# Altium PCB FTDI_JTAG_Prog_SOM_Bd.PcbDoc
Units mm, origin at the board's own origin, x right, y up, seen from the top; angles counter-clockwise.
Board outline 80 x 22 mm, 4 copper layers (L1 (Sig), L2 (GND), L3 (PWR), L4 (Sig)), stack 0.77 mm thick; 53 components, 40 nets, 264 pads, 219 vias.
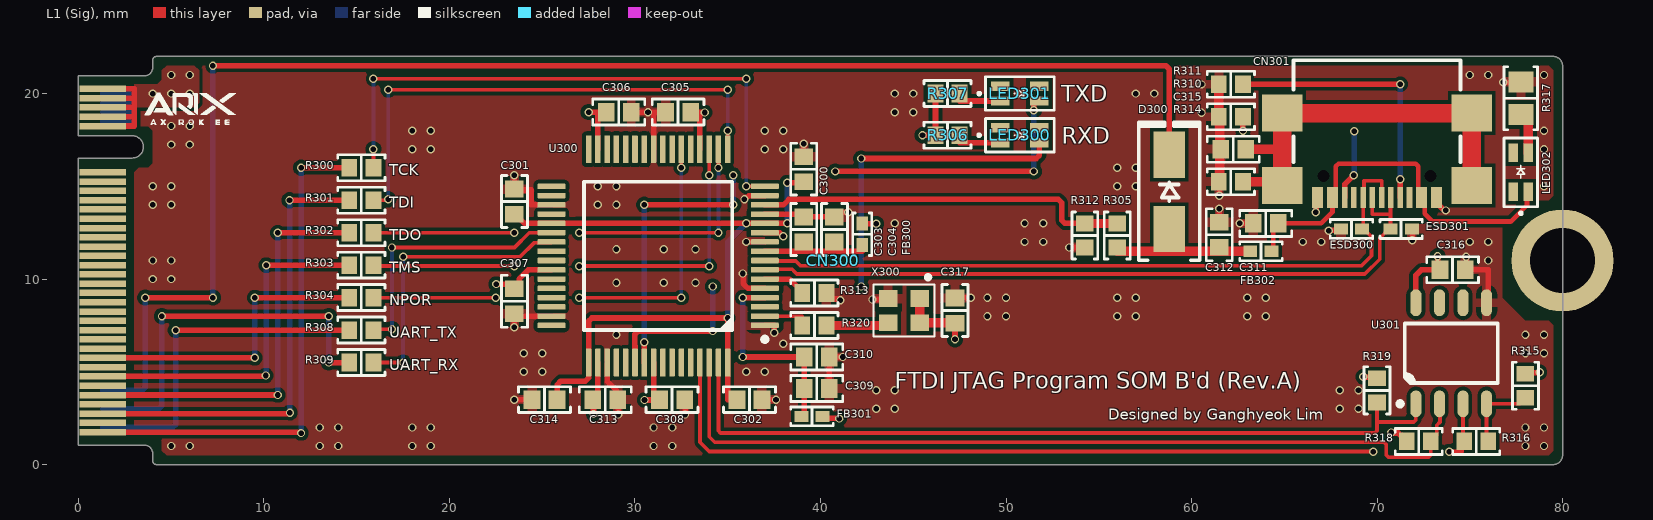
[diagram p0: L1 (Sig) view]
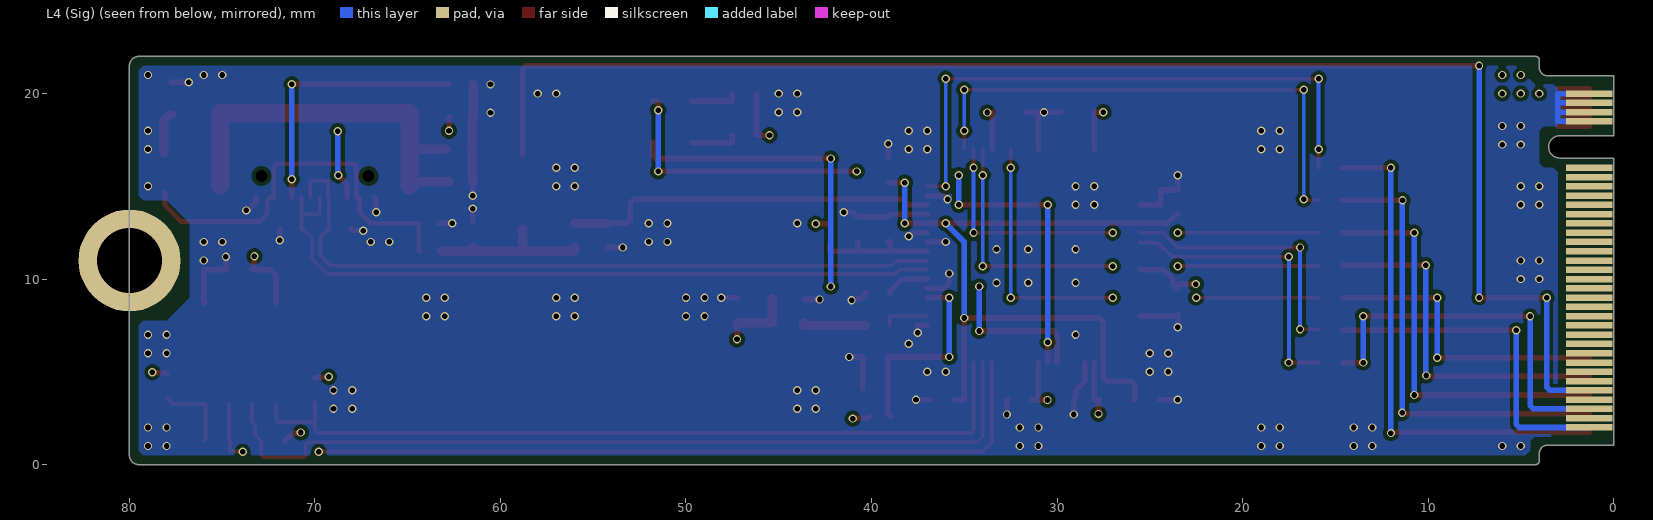
[diagram p1: L4 (Sig) view, seen from below]
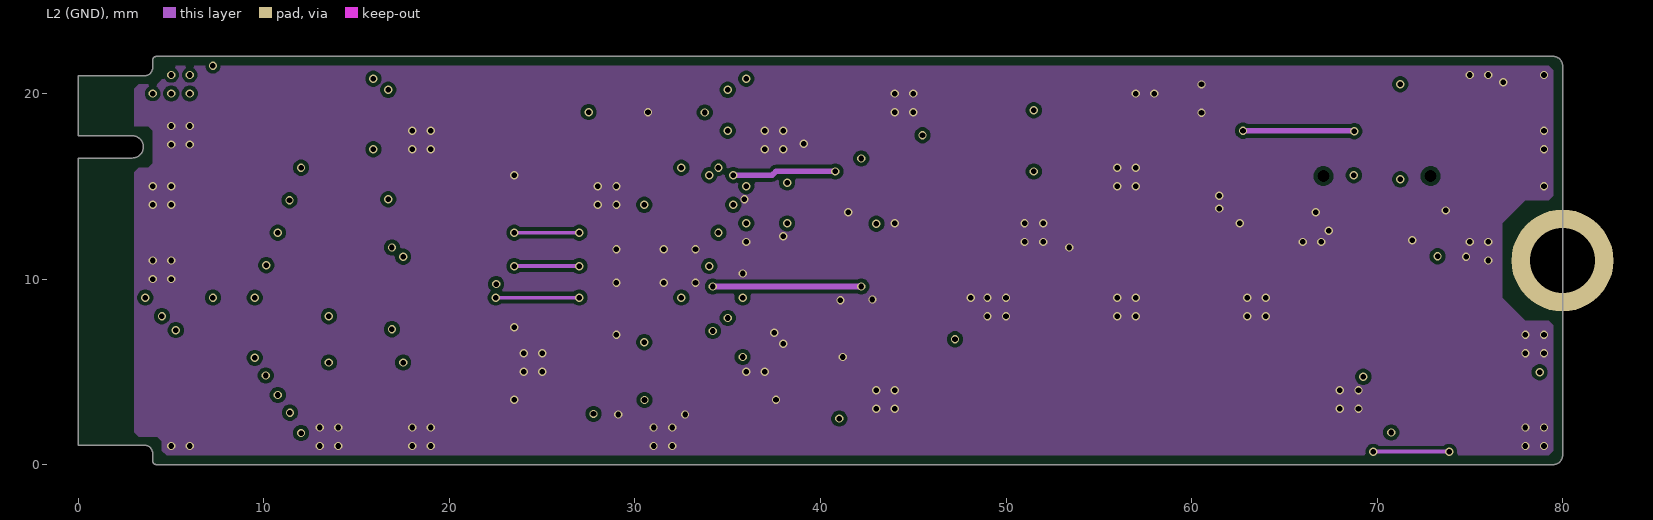
[diagram p2: L2 (GND)]
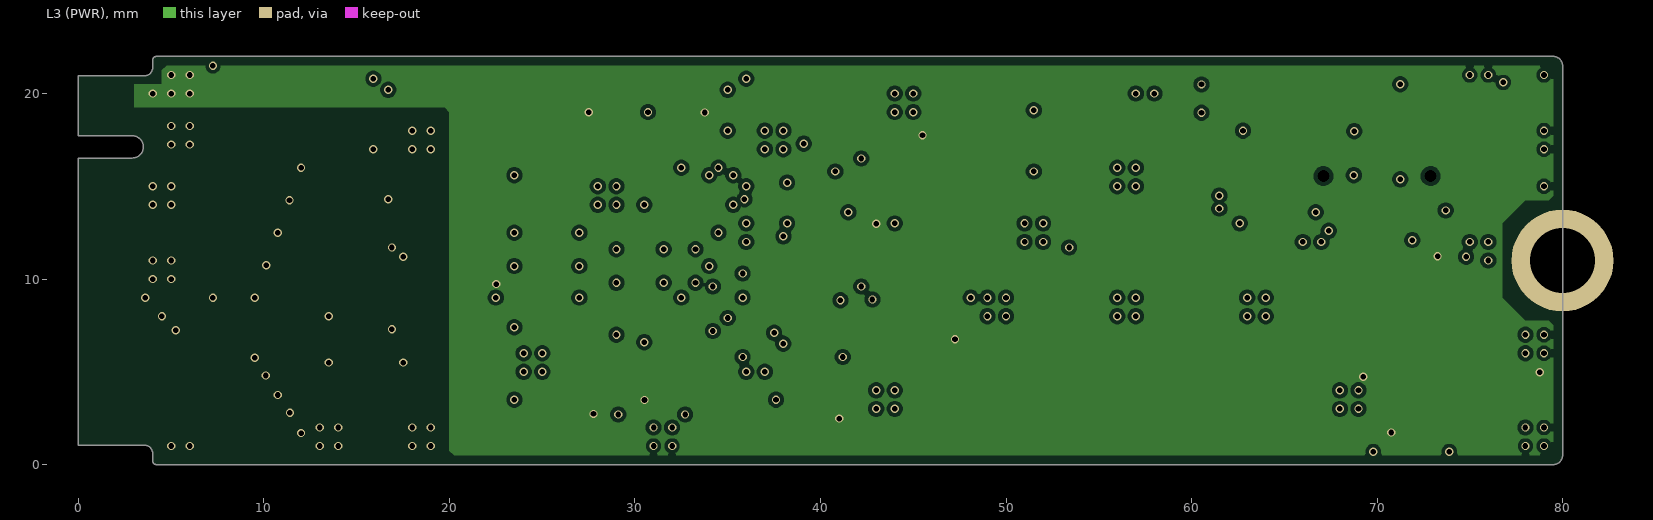
[diagram p3: L3 (PWR)]

## Layer stack, top to bottom
Top Mask: solder mask 0.015, Solder Resist, Dk 3.8
L1 (Sig): signal copper 0.035
Dielectric 1: prepreg 0.2, 7628, Dk 4.6
L2 (GND): signal copper 0.0175
Core: core 0.265, FR-4, Dk 4.5
L3 (PWR): signal copper 0.0175
Dielectric 2: prepreg 0.2, 7628, Dk 4.6
L4 (Sig): signal copper 0.035
Bottom Mask: solder mask 0.015, Solder Resist, Dk 3.8

## Board outline
0,16.525 2.9,16.525 ccw(c2.9,17.125) 2.9,17.725 0,17.725 0,20.95 3.55,20.95 ccw(c3.55,21.4) 4,21.4 4,21.8 cw(c4.2,21.8) 4.2,22 79.5,22 cw(c79.5,21.5) 80,21.5 80,0.5 cw(c79.5,0.5) 79.5,0 4.2,0 cw(c4.2,0.2) 4,0.2 4,0.6 ccw(c3.55,0.6) 3.55,1.05 0,1.05

## Design rules (kind name [scope] priority, off if disabled: settings)
BoardOutlineClearance [All] p1: gap=0.2 ignorepadtopadclearanceinfootprint=FALSE except(0.4: Arc-SplitBarrior Arc-SplitContinuation Track-SplitBarrior Track-SplitContinuation SMDPad-SplitBarrior SMDPad-SplitContinuation THPad-SplitBarrior THPad-SplitContinuation Via-SplitBarrior Via-SplitContinuation Fill-SplitBarrior Fill-SplitContinuation Poly-SplitBarrior Poly-SplitContinuation Region-SplitBarrior Region-SplitContinuation Text-SplitBarrior Text-SplitContinuation)
Clearance "Clearance Bottom Layer" [OnLayer('Bottom Layer')] p1: gap=0.203 ignorepadtopadclearanceinfootprint=TRUE except(0.254: Arc-Text Track-Text SMDPad-Text THPad-Text Via-Text Fill-Text Poly-Text Region-Text Text-Text)
Clearance "Clearance Top Layer" [OnLayer('Top Layer')] p2: gap=0.203 ignorepadtopadclearanceinfootprint=TRUE except(0.254: Arc-Text Track-Text SMDPad-Text THPad-Text Via-Text Fill-Text Poly-Text Region-Text Text-Text)
Clearance [All] p3: gap=0.2 ignorepadtopadclearanceinfootprint=FALSE except(0.089: Arc-Arc Arc-Track Arc-SMDPad Track-Track Track-SMDPad SMDPad-SMDPad; 0.127: Arc-Via Track-Via SMDPad-Via THPad-Via Via-Via; 0.254: Arc-Text Track-Text SMDPad-Text THPad-Text Via-Text Fill-Text Poly-Text Region-Text Text-Text)
ComponentClearance [All] p1: gap=0.254 collisioncheckmode=3 verticalgap=0.254 showdistances=FALSE donotcheckwithout3dbody=TRUE
DiffPairsRouting [All] p1: maxlimit=0.254 minlimit=0.2 mostfreqgap=0.25 toplayer_minwidth=0.1 toplayer_maxwidth=0.381 toplayer_prefwidth=0.2 midlayer1_minwidth=0.1 midlayer1_maxwidth=0.381 midlayer1_prefwidth=0.2 midlayer2_minwidth=0.1 midlayer2_maxwidth=0.381 midlayer2_prefwidth=0.2 bottomlayer_minwidth=0.1 bottomlayer_maxwidth=0.381 bottomlayer_prefwidth=0.2 maxuncoupledlength=12.7
HoleSize [All] p1: absolutevalues=TRUE maxlimit=6.3 minlimit=0.2 maxpercent=80.000 minpercent=20.000
MinimumAnnularRing [All] p1: minimumring=0.076
MinimumSolderMaskSliver [All] p1: minsoldermaskwidth=0.1
PolygonConnect PolygonConnect_1 [All] p1: thpad.connectstyle=Relief thpad.reliefconductorwidth=0.508 thpad.reliefentries=4 thpad.polygonreliefangle="90 Angle" thpad.airgapwidth=0.254 smdpad.connectstyle=Relief smdpad.reliefconductorwidth=0.508 smdpad.reliefentries=4 smdpad.polygonreliefangle="90 Angle" smdpad.airgapwidth=0.254 via.connectstyle=Direct via.reliefconductorwidth=0.508 via.reliefentries=4 via.polygonreliefangle="90 Angle" via.airgapwidth=0.254
RoutingCorners [All] p1: cornerstyle=Round minsetback=2.54 maxsetback=2.54
RoutingVias [All] p1: holewidth=0.3 width=0.45 viastyle="Through Hole" minholewidth=0.15 minwidth=0.3 maxholewidth=1 maxwidth=2
SilkToSilkClearance [All] p1: silktosilkclearance=0.1
SilkToSolderMaskClearance [IsPad] p1: minsilkscreentomaskgap=0.1 clearancetoexposedcopper=TRUE
SolderMaskExpansion [All] p1: expansion=0.102 istentingtop=FALSE
Width [All] p1: maxlimit=2 minlimit=0.1 preferedwidth=0.2
23 further rules are at their usual default settings.

## Classes and differential pairs
differential pair class DIFF90: USB_FTDI_D
differential pair USB_FTDI_D: +USB_FTDI_D_P -USB_FTDI_D_N

## Components (designator, comment, footprint, x,y, rotation, side; value= is the part's Value field where it differs from the comment)
C300 "100nF/16V/1608" "CAP 1608 (0603_INCH)" 39.1,15.925 r270 top
C301 "100nF/16V/1608" "CAP 1608 (0603_INCH)" 23.5,14.175 r270 top
C302 "100nF/16V/1608" "CAP 1608 (0603_INCH)" 36.175,3.5 r180 top
C303 "4.7uF/16V/1608" "CAP 1608 (0603_INCH)" 39.1,12.675 r270 top
C304 "100nF/16V/1608" "CAP 1608 (0603_INCH)" 40.75,12.675 r270 top
C305 "100nF/16V/1608" "CAP 1608 (0603_INCH)" 32.325,19 r0 top
C306 "100nF/16V/1608" "CAP 1608 (0603_INCH)" 29.125,19 r180 top
C307 "100nF/16V/1608" "CAP 1608 (0603_INCH)" 23.5,8.8 r90 top
C308 "100nF/16V/1608" "CAP 1608 (0603_INCH)" 32,3.5 r180 top
C309 "4.7uF/16V/1608" "CAP 1608 (0603_INCH)" 39.8,4.1 r180 top
C310 "100nF/16V/1608" "CAP 1608 (0603_INCH)" 39.8,5.8 r180 top
C311 "100nF/16V/1608" "CAP 1608 (0603_INCH)" 64,13 r0 top
C312 "100nF/16V/1608" "CAP 1608 (0603_INCH)" 61.5,12.392 r270 top
C313 "100nF/16V/1608" "CAP 1608 (0603_INCH)" 28.4,3.5 r180 top
C314 "4.7uF/16V/1608" "CAP 1608 (0603_INCH)" 25.125,3.5 r0 top
C315 "100nF/50V/1608" "CAP 1608 (0603_INCH)" 62.25,17 r180 top
C316 "100nF/16V/1608" "CAP 1608 (0603_INCH)" 74.075,10.5 r180 top
C317 "100nF/16V/1608" "CAP 1608 (0603_INCH)" 47.25,8.3 r270 top
CN300 "M.2-KEY-M_Edge" CON_M.2-KEY-M_MALE_22x80 0,11 r270 top locked
CN301 "MC-311S" "CON USB-Type-C (16P)" 70,17 r180 top locked
D300 "SS210" "DIO DO-214AC (SMA)" 58.8,14.7 r90 top
ESD300 "CG0402MLU-3.3G" "RES 1005 (0402_inch)" 68.625,12.7 r0 top
ESD301 "CG0402MLU-3.3G" "RES 1005 (0402_inch)" 71.3,12.7 r180 top
FB300 "BLM15PX121SN1D" "FB 1005 (0402_inch)" 42.25,12.418 r270 top
FB301 "BLM15PX121SN1D" "FB 1005 (0402_inch)" 39.543,2.6 r180 top
FB302 "BLM15PX121SN1D" "FB 1005 (0402_inch)" 63.743,11.5 r180 top
LED300 "BLUE/2012" "LED MHT170RGBCT (BLUE)" 50.75,17.75 r0 top
LED301 "BLUE/2012" "LED MHT170RGBCT (BLUE)" 50.75,20 r0 top
LED302 "BLUE/2012" "LED MHT170RGBCT (BLUE)" 77.75,15.75 r90 top
R300 "22R/1608" "RES 1608 (0603_inch)" 15.25,16 r180 top value=22R
R301 "22R/1608" "RES 1608 (0603_inch)" 15.25,14.25 r180 top value=22R
R302 "22R/1608" "RES 1608 (0603_inch)" 15.25,12.5 r180 top value=22R
R303 "22R/1608" "RES 1608 (0603_inch)" 15.25,10.75 r180 top value=22R
R304 "22R/1608" "RES 1608 (0603_inch)" 15.25,9 r180 top value=22R
R305 "100K/1608" "RES 1608 (0603_inch)" 56,12.35 r270 top value=100K
R306 "510R/1608" "RES 1608 (0603_inch)" 46.85,17.75 r180 top value=510R
R307 "510R/1608" "RES 1608 (0603_inch)" 46.85,20 r180 top value=510R
R308 "22R/1608" "RES 1608 (0603_inch)" 15.25,7.25 r180 top value=22R
R309 "22R/1608" "RES 1608 (0603_inch)" 15.25,5.5 r180 top value=22R
R310 "5.1K/1608" "RES 1608 (0603_inch)" 62.12,18.75 r0 top value=5.1K
R311 "5.1K/1608" "RES 1608 (0603_inch)" 62.12,20.5 r0 top value=5.1K
R312 "100K/1608" "RES 1608 (0603_inch)" 54.25,12.35 r90 top value=100K
R313 "12K/1608" "RES 1608 (0603_inch)" 39.67,9.25 r180 top value=12K
R314 "1M/1608/0.1W" "RES 1608 (0603_inch)" 62.12,15.25 r180 top value=1M
R315 "12K/1608" "RES 1608 (0603_inch)" 78,4.25 r90 top value=12K
R316 "2.2K/1608" "RES 1608 (0603_inch)" 75.35,1.25 r180 top value=2.2K
R317 "680R/2012" "RES 2012 (0805_inch)" 77.75,19.75 r90 top value=680R
R318 "12K/1608" "RES 1608 (0603_inch)" 72.25,1.25 r180 top value=12K
R319 "12K/1608" "RES 1608 (0603_inch)" 70,4 r90 top value=12K
R320 "22R/1608" "RES 1608 (0603_inch)" 39.67,7.5 r180 top value=22R
U300 "FT2232HL-REEL" IC_LQFP-64-0.5mm 31.25,11.25 r180 top locked
U301 "93LC56B-I/SN" "IC_SOIC-8 (4.90x3.90mm)" 74,6 r90 top
X300 "S2D12.000000B20F30T(12MHz)" "OSC SMD_2.5x2.0 (SCTF)" 44.5,8.3 r180 top

## Footprints (in the part's own frame and the unit in brackets; to place one, negate y for a bottom-side part, rotate by r counter-clockwise, add the part's x,y. Pads: shape width x height; smd on the part's side, far side on the other; paste and mask are expansions set on the pad)
"CAP 1608 (0603_INCH)" [mm] "Chip Capacitor, 2-Leads, Body 1.60x0.80mm, IPC Medium Density"
  rect 0.9x1 smd mask+0.04: 1(-0.675,0) 2(0.675,0)
  silkscreen extent -1.4,-0.7 1.4,0.7, body extent -0.8,-0.41 0.8,0.41, height 0.82
"CON USB-Type-C (16P)" [mm] "USB 2.0 5A 1 Surface Mount 16 Female -35℃~+75℃ Type-C SMD  USB Connectors ROHS"
  round 0 hole 0.65: 0(-2.89,1.45) 0(2.89,1.45)
  rect 0.6x1.15 smd mask+0.03: A1(-3.2,2.6) A4(-2.4,2.6) B1(3.2,2.6) B4(2.4,2.6)
  rect 0.3x1.15 smd mask+0.03: A5(-1.25,2.6) A6(-0.25,2.6) A7(0.25,2.6) A8(1.25,2.6) B5(1.75,2.6) B6(0.75,2.6) B7(-0.75,2.6) B8(-1.75,2.6)
  rect 2.18x2 smd mask+0.03: S1(-5.11,1.95) S2(-5.11,-1.95) S3(5.11,-1.95) S4(5.11,1.95)
  silkscreen extent -4.5,-4.8 4.5,0.7, body extent -5.65,-4.83 5.65,2.87, height 3.26
CON_M.2-KEY-M_MALE_22x80 [mm]
  rect 0.35x2.5 smd: 1(9.25,1.3) 3(8.75,1.3) 5(8.25,1.3) 7(7.75,1.3) 9(7.25,1.3) 11(6.75,1.3) 13(6.25,1.3) 15(5.75,1.3) 17(5.25,1.3) 19(4.75,1.3) 21(4.25,1.3) 23(3.75,1.3) 25(3.25,1.3) 27(2.75,1.3) 29(2.25,1.3) 31(1.75,1.3) 33(1.25,1.3) 35(0.75,1.3) 37(0.25,1.3) 39(-0.25,1.3) 41(-0.75,1.3) 43(-1.25,1.3) 45(-1.75,1.3) 47(-2.25,1.3) 49(-2.75,1.3) 51(-3.25,1.3) 53(-3.75,1.3) 55(-4.25,1.3) 57(-4.75,1.3) 67(-7.25,1.3) 69(-7.75,1.3) 71(-8.25,1.3) 73(-8.75,1.3) 75(-9.25,1.3)
  rect 0.35x2.5 smd far side: 2(9,1.3) 4(8.5,1.3) 6(8,1.3) 8(7.5,1.3) 10(7,1.3) 12(6.5,1.3) 14(6,1.3) 16(5.5,1.3) 18(5,1.3) 20(4.5,1.3) 22(4,1.3) 24(3.5,1.3) 26(3,1.3) 28(2.5,1.3) 30(2,1.3) 32(1.5,1.3) 34(1,1.3) 36(0.5,1.3) 38(0,1.3) 40(-0.5,1.3) 42(-1,1.3) 44(-1.5,1.3) 46(-2,1.3) 48(-2.5,1.3) 50(-3,1.3) 52(-3.5,1.3) 54(-4,1.3) 56(-4.5,1.3) 58(-5,1.3) 68(-7.5,1.3) 70(-8,1.3) 72(-8.5,1.3) 74(-9,1.3)
  round 5.5 hole 3.5: MH(0,80)
"DIO DO-214AC (SMA)" [mm] "Molded Diode, 2-Leads, Body 4.30x2.60mm, IPC Medium Density"
  rect 2.5x1.7 smd: 1(-2,0) 2(2,0)
  silkscreen extent -3.68,-1.65 3.75,1.65, body extent -2.6,-1.37 2.6,1.37, height 2.4
"FB 1005 (0402_inch)" [mm] "Chip Ferrite Bead, 2-Leads, Body 1.0x0.5mm, IPC Medium Density"
  rect 0.75x0.6 smd: 1(-0.575,0) 2(0.575,0)
  silkscreen extent -1.14,-0.51 1.14,0.51, body extent -0.5,-0.25 0.5,0.25, height 0.35
IC_LQFP-64-0.5mm [mm] "TSQFP, 64-Leads, Body 10.00x10.00mm, Pitch 0.50mm, IPC Medium Density"
  rrect25% 1.5x0.3 smd mask+0.038: 1(-5.75,3.75) 2(-5.75,3.25) 3(-5.75,2.75) 4(-5.75,2.25) 5(-5.75,1.75) 6(-5.75,1.25) 7(-5.75,0.75) 8(-5.75,0.25) 9(-5.75,-0.25) 10(-5.75,-0.75) 11(-5.75,-1.25) 12(-5.75,-1.75) 13(-5.75,-2.25) 14(-5.75,-2.75) 15(-5.75,-3.25) 16(-5.75,-3.75) 33(5.75,-3.75) 34(5.75,-3.25) 35(5.75,-2.75) 36(5.75,-2.25) 37(5.75,-1.75) 38(5.75,-1.25) 39(5.75,-0.75) 40(5.75,-0.25) 41(5.75,0.25) 42(5.75,0.75) 43(5.75,1.25) 44(5.75,1.75) 45(5.75,2.25) 46(5.75,2.75) 47(5.75,3.25) 48(5.75,3.75)
  rrect25% 0.3x1.5 smd mask+0.038: 17(-3.75,-5.75) 18(-3.25,-5.75) 19(-2.75,-5.75) 20(-2.25,-5.75) 21(-1.75,-5.75) 22(-1.25,-5.75) 23(-0.75,-5.75) 24(-0.25,-5.75) 25(0.25,-5.75) 26(0.75,-5.75) 27(1.25,-5.75) 28(1.75,-5.75) 29(2.25,-5.75) 30(2.75,-5.75) 31(3.25,-5.75) 32(3.75,-5.75) 49(3.75,5.75) 50(3.25,5.75) 51(2.75,5.75) 52(2.25,5.75) 53(1.75,5.75) 54(1.25,5.75) 55(0.75,5.75) 56(0.25,5.75) 57(-0.25,5.75) 58(-0.75,5.75) 59(-1.25,5.75) 60(-1.75,5.75) 61(-2.25,5.75) 62(-2.75,5.75) 63(-3.25,5.75) 64(-3.75,5.75)
  silkscreen extent -5.88,-4 4,4.62, body extent -6,-6 6,6, height 1.6
"IC_SOIC-8 (4.90x3.90mm)" [mm] "SOIC, 8-Leads, Body 4.90x3.90mm, Pitch 1.27mm, IPC Medium Density"
  oval 1.45x0.6 smd: 1(-2.725,1.905) 2(-2.725,0.635) 3(-2.725,-0.635) 4(-2.725,-1.905) 5(2.725,-1.905) 6(2.725,-0.635) 7(2.725,0.635) 8(2.725,1.905)
  silkscreen extent -2.85,-2.5 1.6,2.88, body extent -3.01,-2.45 3.01,2.45, height 1.5
"LED MHT170RGBCT (BLUE)" [mm] "Colorless transparence -30℃~+85℃ Positive post Common anode RGB 120° 0805  Light Emitting Diodes (LED) ROHS"
  rect 1x0.5 smd mask+0.04: 1(-1.05,0.4) 2(1.05,0.4) 3(1.05,-0.4) 4(-1.05,-0.4)
  silkscreen extent -2.25,-0.9 1.85,0.9, body extent -1,-0.62 1,0.62, height 0.9
"OSC SMD_2.5x2.0 (SCTF)" [mm] "SMD Oscillator_2.5x2.0 (SCTF)"
  rect 1x0.9 smd: 1(-0.85,-0.65) 2(0.85,-0.65) 3(0.85,0.65) 4(-0.85,0.65)
  silkscreen extent -1.65,-1.9 1.65,1.4, body extent -1.25,-1 1.25,1, height 0.9
"RES 1005 (0402_inch)" [mm] "Chip Resistor, 2-Leads, Body 1.0x0.5mm, IPC Medium Density"
  rect 0.75x0.6 smd: 1(-0.575,0) 2(0.575,0)
  silkscreen extent -1.14,-0.51 1.14,0.51, body extent -0.5,-0.25 0.5,0.25, height 0.35
"RES 1608 (0603_inch)" [mm] "Chip Resistor, 2-Leads, Body 1.60x0.80mm, IPC Medium Density"
  rect 0.85x0.95 smd: 1(-0.65,0) 2(0.65,0)
  silkscreen extent -1.27,-0.7 1.27,0.7, body extent -0.8,-0.4 0.8,0.4, height 0.45
"RES 2012 (0805_inch)" [mm] "Chip Resistor, 2-Leads, Body 2.00x1.25mm, IPC Medium Density"
  rect 1.15x1.35 smd: 1(-0.875,0) 2(0.875,0)
  silkscreen extent -1.7,-0.9 1.7,0.9, body extent -1,-0.62 1,0.63, height 0.6

## Part data
C300 C301 C302 C304 C305 C306 C307 C308 C310 C311 C312 C313 C316 C317: library part CAP_100nF/16V/1608, "Ceramic CAP_100nF/16V/1608", JLCPCB Part Type="Extended Part", LCSC Part #=C66501
C303 C309 C314: library part CAP_4.7uF/16V/1608, "Ceramic CAP_4.7uF/16V/1608", JLCPCB Part Type="Basic Part", LCSC Part #=C19666
C315: library part CAP_100nF/50V/1608, "Ceramic CAP_100nF/50V/1608", JLCPCB Part Type="Basic Part", LCSC Part #=C14663
CN300: library part CON_M.2-KEY-M_MALE, "M.2 Key M Edge"
CN301: library part CON_USB-Type-C, "USB 2.0 5A 1 Surface Mount 16 Female -35℃~+75℃ Type-C SMD  USB Connectors ROHS", JLCPCB Part Type="Extended Part", LCSC Part #=C2977718
D300: library part DIO_SS210, "100V 850mV@2A 2A SMA(DO-214AC)  Schottky Barrier Diodes (SBD) ROHS", JLCPCB Part Type="Basic Part", LCSC Part #=C14996
ESD300 ESD301: library part ESD_CG0402MLU-3.3G, "Varistor 1 Circuit Surface Mount, MLCV 0402 (1005 Metric)", JLCPCB Part Type="Extended Part", LCSC Part #=C2655393
FB300 FB301 FB302: library part FB_BLM15PX121SN1D, "55mΩ ±25% 120Ω@100MHz 0402  Ferrite Beads ROHS", JLCPCB Part Type="Extended Part", LCSC Part #=C88970
LED300 LED301 LED302: library part LED_MHT170RGBCT(BLUE), "Colorless transparence -30℃~+85℃ Positive post Common anode RGB 120° 0805  Light Emitting Diodes (LED) ROHS", JLCPCB Part Type="Extended Part", LCSC Part #=C2962094
R300 R301 R302 R303 R304 R308 R309 R320: library part RES_22R/1608/0.1W, "RES_22R/1608/0.1W", JLCPCB Part Type="Basic Part", LCSC Part #=C23345, Power Rating=0.1W, Precision=1%, Size=1608
R305 R312: library part RES_100K/1608/0.1W, "RES_100K/1608/0.1W", JLCPCB Part Type="Basic Part", LCSC Part #=C25803, Power Rating=0.1W, Precision=1%, Size=1608
R306 R307: library part RES_510R/1608/0.1W, "RES_510R/1608/0.1W", JLCPCB Part Type="Basic Part", LCSC Part #=C23193, Power Rating=0.1W, Precision=1%, Size=1608
R310 R311: library part RES_5.1K/1608/0.1W, "RES_5.1K/1608/0.1W", JLCPCB Part Type="Basic Part", LCSC Part #=C23186, Power Rating=0.1W, Precision=1%, Size=1608
R313 R315 R318 R319: library part RES_12K/1608/0.1W, "RES_12K/1608/0.1W", JLCPCB Part Type="Basic Part", LCSC Part #=C22790, Power Rating=0.1W, Precision=1%, Size=1608
R314: library part RES_1M/1608/0.1W, "RES_1M/1608/0.1W", JLCPCB Part Type="Basic Part", LCSC Part #=C22935, Power Rating=0.1W, Precision=1%, Size=1608
R316: library part RES_2.2K/1608/0.1W, "RES_2.2K/1608/0.1W", JLCPCB Part Type="Basic Part", LCSC Part #=C4190, Power Rating=0.1W, Precision=1%, Size=1608
R317: library part RES_680R/2012/0.125W, "RES_680R/2012/0.125W", JLCPCB Part Type="Basic Part", LCSC Part #=C17798, Power Rating=0.125W, Precision=1%, Size=2012
U300: library part IC_USB_FT2232HL-REEL, "USB Bridge, USB to UART,FIFO USB 2.0 UART Interface 64-LQFP (10x10)", JLCPCB Part Type="Extended Part", LCSC Part #=C27882
U301: library part IC_EEPROM_93LC56B-I/SN, "EEPROM Memory IC 2Kbit Microwire 2 MHz 8-SOIC", JLCPCB Part Type="Extended Part", LCSC Part #=C183620
X300: library part OSC_S2D12.000000B20F30T(12MHz), "3.3V~3.3V -40℃~+85℃ 20mA ±20ppm 12MHz SMD2520-4P  Oscillators ROHS", JLCPCB Part Type="Extended Part", LCSC Part #=C387449

## Via types
v1: diameter 0.45, hole 0.3, L1 (Sig) to L4 (Sig), tented both sides, 219 vias

## Nets (pads, with @x,y where several pads share a name; then routed paths per layer and width w, separated by ;. In a path a pad name is that pad's centre, name@x,y a point inside that pad or via, vN(x,y) a via of type N, cw(c..) or ccw(c..) an arc to the next point about the centre after c; other vN are vias at no path point)
+1.8V_FTDI: C300.2 C301.2 C302.2 C314.2 U300.12 U300.37 U300.49 U300.64 | length 41.7
  L1 (Sig) w0.3: C301.2 23.55,13.5 24.05,13 24.1,13 U300.37 26.79,13 26.792,13.002 34.708,13.002 34.71,13 v1(36,13) U300.12 v1(38.2,13) ; C314.2 25.8,4.3 26,4.5 27.324,4.5 27.5,4.676 27.5,7.724 27.676,7.9 v1(35,7.9) U300.64 35,3.5 C302.2 ; v1(38.2,15.2) 39.05,15.2 C300.2
  L4 (Sig) w0.3: v1(35,7.9) 35,12 v1(36,13) ; v1(38.2,13) v1(38.2,15.2)
+3.3V: C305.2 C306.2 C307.2 C308.2 C313.2 C316.2 C317.2 CN300.67 CN300.69 CN300.71 CN300.73 CN300.75 FB300.1 FB301.1 R306.2 R307.2 R315.2 R318.2 R319.2 U300.20 U300.31 U300.42 U300.50 U300.56 U301.8 X300.1 X300.4 | length 40.4
  L1 (Sig) w0.3: CN300.67 3,18.25 3,18.838 ; CN300.69 2.912,18.75 3,18.838 ; CN300.71 3,19.25 ; CN300.73 3,19.75 ; CN300.75 3,20.25 3,19.75 ; v1(22.513,9.73) 23.5,9.73 C307.2 23.75,9.725 23.75,10 24.25,10.5 U300.42 ; v1(27.5,19) 28,19 U300.31 ; v1(27.763,2.73) 27.763,3.462 C313.2 28,3.5 U300.50 ; v1(30.513,3.48) 31.305,3.48 C308.2 31,3.5 U300.56 ; U300.20 33.5,18.98 v1(33.763,18.98) ; FB301.1 40.209,2.509 40.984,2.509 v1(41.013,2.48) ; FB300.1 42.257,12.986 43.006,12.986 v1(43.013,12.98) ; v1(45.5,17.75) R306.2 R307.2 ; v1(47.25,6.75) C317.2 ; v1(69.263,4.73) 69.292,4.701 69.949,4.701 R319.2 ; v1(70.763,1.73) 70.792,1.701 71.149,1.701 71.275,1.575 71.325,1.575 71.6,1.3 R318.2 ; U301.8 72.095,10.207 72.388,10.5 C316.2 73.263,10.637 v1(73.263,11.23) ; R315.2 78.051,4.951 78.734,4.951 v1(78.763,4.98) ; 3,18.838 3,19.25 ; 3,19.25 3,19.75
  L1 (Sig) w0.5: X300.1 X300.4 47.25,7.65 C317.2
  other v1: 4,20 5,20 6,20 5,21 6,21
+5V: CN300.10 D300.2 | length 79.6
  L1 (Sig) w0.3: v1(3.6,9) v1(7.25,9) ; v1(7.25,21.5) 58.624,21.5 58.8,21.324 D300.2
  L4 (Sig) w0.3: CN300.10 3.424,4 3.6,4.176 v1(3.6,9) ; v1(7.25,9) v1(7.25,21.5)
+5V_USB: C311.2 CN301.A4 CN301.B4 FB302.1 LED302.4 | length 21.9
  L1 (Sig) w0.25: FB302.1 64.4,11.5 64.4,13 67,13 67.596,13.596 67.596,14.396 CN301.B4 67.775,14.4 67.775,16.079 67.921,16.225 72.079,16.225 72.225,16.079 72.225,14.4 CN301.A4 72.575,14.225 72.575,13.525 73,13.1 77.2,13.1 78.085,13.985 78.085,14.635 LED302.4
CLK_12MHZ: R320.1 X300.3 | length 3.5
  L1 (Sig) w0.5: R320.1 43.65,7.5 X300.3
FTDI_EECLK: R318.1 U300.62 U301.2 | length 46.7
  L1 (Sig) w0.2: U300.62 34,1.5 34.3,1.2 70.383,1.2 70.5,1.083 70.5,0.517 70.617,0.4 72.783,0.4 72.9,0.517 R318.1 73.225,1.575 73.225,2.125 73.4,2.3 73.4,3.24 U301.2
FTDI_EECS: R319.1 U300.63 U301.1 | length 43.8
  L1 (Sig) w0.2: U300.63 34.5,1.817 34.617,1.7 69.883,1.7 70,1.817 70,2.3 ; R319.1 70,2.3 ; U301.1 72.095,2.417 71.978,2.3 70,2.3
FTDI_EEDATA: R316.2 U300.61 U301.3 | length 48.2
  L1 (Sig) w0.2: U300.61 33.5,1.2 34,0.7 v1(69.8,0.7) ; v1(73.9,0.7) 74.583,0.7 74.583,1.263 74.635,1.315 U301.3
  L2 (GND) w0.2: v1(69.8,0.7) v1(73.9,0.7)
FTDI_NPOR: R304.1 U300.22 | length 24.6
  L1 (Sig) w0.2: R304.1 v1(22.5,9) ; v1(27,9) v1(32.5,9) ; v1(32.5,16) U300.22
  L2 (GND) w0.2: v1(22.5,9) v1(27,9)
  L4 (Sig) w0.2: v1(32.5,9) v1(32.5,16)
FTDI_NRST: R305.1 R312.2 U300.14 | length 20.2
  L1 (Sig) w0.3: U300.14 38,14 38.3,14.3 52.824,14.3 53,14.124 53,13.176 53.176,13 R312.2
  L1 (Sig) w0.5: R312.2 R305.1
FTDI_OSCI: R320.2 U300.2 | length 2.5
  L1 (Sig) w0.2: U300.2 39,8 39.02,8 R320.2
FTDI_REF: R313.2 U300.6 | length 2.4
  L1 (Sig) w0.3: U300.6 38.32,10 39.02,9.3 R313.2
FTDI_RX: R309.1 U300.39 | length 15.6
  L1 (Sig) w0.2: R309.1 v1(17.5,5.5) ; v1(17.5,11.2) 23.8,11.2 24.55,11.95 25.45,11.95 U300.39
  L4 (Sig) w0.2: v1(17.5,5.5) v1(17.5,11.2)
FTDI_RX_LED_A: LED300.4 R306.1 | length 2.6
  L1 (Sig) w0.3: R306.1 47.5,17.35 LED300.4
FTDI_RX_LED_K: LED300.3 U300.54 | length 33.4
  L1 (Sig) w0.3: U300.54 30,6.39 29.998,6.392 29.998,7.024 30.174,7.2 v1(34.2,7.2) ; v1(42.2,16.5) 51.624,16.5 51.8,16.676 LED300.3
  L2 (GND) w0.3: v1(34.2,9.6) v1(42.2,9.6)
  L4 (Sig) w0.3: v1(34.2,7.2) v1(34.2,9.6) ; v1(42.2,9.6) v1(42.2,16.5)
FTDI_TCK: R300.1 U300.16 | length 31.7
  L1 (Sig) w0.2: R300.1 v1(15.9,17) ; v1(15.9,20.8) v1(36,20.8) ; v1(36,15) U300.16
  L4 (Sig) w0.2: v1(15.9,17) v1(15.9,20.8) ; v1(36,15) v1(36,20.8)
FTDI_TDI: R301.1 U300.17 | length 28.3
  L1 (Sig) w0.2: R301.1 16.7,14.25 v1(16.7,14.3) ; v1(16.7,20.2) v1(35,20.2) ; U300.17 v1(35,18)
  L4 (Sig) w0.2: v1(16.7,14.3) v1(16.7,20.2) ; v1(35,18) v1(35,20.2)
FTDI_TDO: R302.1 U300.18 | length 23.1
  L1 (Sig) w0.2: R302.1 15.9,12.498 v1(23.5,12.498) ; v1(27,12.5) v1(34.5,12.5) ; v1(34.5,16) U300.18
  L2 (GND) w0.2: v1(23.5,12.498) 23.5,12.5 v1(27,12.5)
  L4 (Sig) w0.2: v1(34.5,12.5) v1(34.5,16)
FTDI_TMS: R303.1 U300.19 | length 24.4
  L1 (Sig) w0.2: R303.1 15.95,10.7 v1(23.5,10.7) ; v1(27,10.7) v1(34,10.7) ; v1(34,15.6) U300.19
  L2 (GND) w0.2: v1(23.5,10.7) v1(27,10.7)
  L4 (Sig) w0.2: v1(34,10.7) v1(34,15.6)
FTDI_TX: R308.1 U300.38 | length 14.4
  L1 (Sig) w0.2: R308.1 15.95,7.3 v1(16.9,7.3) ; v1(16.9,11.7) 23.5,11.7 24.3,12.5 U300.38
  L4 (Sig) w0.2: v1(16.9,7.3) v1(16.9,11.7)
FTDI_TX_LED_A: LED301.4 R307.1 | length 2.6
  L1 (Sig) w0.3: R307.1 47.5,19.6 LED301.4
FTDI_TX_LED_K: LED301.3 U300.55 | length 35.2
  L1 (Sig) w0.3: U300.55 v1(30.5,6.6) ; v1(30.5,14) v1(35.3,14) ; v1(40.8,15.8) v1(51.5,15.8) ; v1(51.5,19.1) 51.5,19.5 51.6,19.6 LED301.3
  L2 (GND) w0.3: v1(35.3,15.6) 37.4,15.6 37.6,15.8 v1(40.8,15.8)
  L4 (Sig) w0.3: v1(30.5,6.6) v1(30.5,14) ; v1(35.3,14) v1(35.3,15.6) ; v1(51.5,15.8) v1(51.5,19.1)
FTDI_VPHY: C309.2 C310.2 FB301.2 U300.4 | length 11
  L1 (Sig) w0.3: v1(35.8,5.8) C310.2 C309.2 39.125,2.75 38.975,2.6 FB301.2 ; v1(35.8,9) U300.4
  L4 (Sig) w0.3: v1(35.8,5.8) v1(35.8,9)
FTDI_VPLL: C303.2 C304.2 FB300.2 U300.9 | length 6.7
  L1 (Sig) w0.3: U300.9 39,11.5 ; C303.2 39,12 39,11.5 ; C304.2 40.75,11.5 ; FB300.2 42.25,11.5 40.75,11.5 ; 39,11.5 40.75,11.5
GND: C300.1 C301.1 C302.1 C303.1 C304.1 C305.1 C306.1 C307.1 C308.1 C309.1 C310.1 C311.1 C312.1 C313.1 C314.1 C315.2 C316.1 C317.1 CN300.68 CN300.70 CN300.72 CN300.74 CN301.A1 CN301.B1 ESD300.1 ESD301.1 R310.1 R311.1 R312.1 R313.1 R314.2 R317.2 U300.1 U300.5 U300.10 U300.11 U300.13 U300.15 U300.25 U300.35 U300.47 U300.51 U301.5 X300.2 | length 56.8
  L1 (Sig) w0.3: v1(23.5,3.5) C314.1 ; v1(23.5,7.4) C307.1 23.625,8 U300.47 ; v1(23.5,15.6) C301.1 23.5,14.8 24.4,14.8 24.4,14 U300.35 ; U300.51 28.5,4.5 29,4 29,3.575 C313.1 29.1,3.475 v1(29.1,2.7) ; C306.1 31,19 ; U300.25 31,19 ; C305.1 31,19 ; C308.1 32.7,3.475 v1(32.7,2.7) ; v1(35.8,10.3) 35.829,10.271 35.829,9.771 36.1,9.5 U300.5 ; v1(35.9,14.3) 35.941,14.3 36.141,14.5 U300.15 ; v1(36,12) U300.10 ; C302.1 v1(37.6,3.5) ; U300.1 37.5,7.5 v1(37.5,7.1) ; U300.11 37.8,12.5 v1(38,12.3) ; U300.13 37.99,13.5 37.992,13.502 38.948,13.502 C303.1 C304.1 41,13.6 v1(41.5,13.6) ; C300.1 v1(39.1,17.3) ; R313.1 40.32,9.2 40.595,8.925 40.966,8.925 41.034,8.856 v1(41.075,8.856) ; C309.1 C310.1 v1(41.2,5.8) ; v1(42.8,8.9) 43.6,8.9 X300.2 ; C317.1 47.275,9 v1(48.1,9) ; v1(53.4,11.7) R312.1 ; R314.2 61.485,15.235 61.485,14.515 v1(61.5,14.5) ; C312.1 v1(61.5,13.8) ; v1(62.6,13) C311.1 ; v1(66.7,13.6) 66.729,13.629 66.729,14.329 CN301.B1 ; v1(67.4,12.6) 67.429,12.629 67.979,12.629 ESD300.1 ; ESD301.1 71.887,12.688 71.887,12.113 v1(71.9,12.1) ; CN301.A1 73.2,14.125 73.596,13.729 73.671,13.729 v1(73.7,13.7) ; v1(74.8,11.2) 74.8,10.55 C316.1 76,10.5 76,8.725 U301.5 ; v1(76.8,20.6) 77.725,20.6 R317.2
  L1 (Sig) w0.5: R314.2 61.523,15.302 61.523,16.947 C315.2 61.522,17.053 61.522,18.697 R310.1 R311.1
  L4 (Sig) w0.3: CN300.68 3,18.5 3,19 ; CN300.70 3,19 ; CN300.72 2.998,19.5 ; CN300.74 3,20 3,19
  other v1: 5,1 6,1 13,1 14,1 18,1 19,1 31,1 32,1 78,1 79,1 13,2 14,2 18,2 19,2 31,2 32,2 78,2 79,2 43,3 44,3 68,3 69,3 43,4 44,4 68,4 69,4 24,5 25,5 36,5 37,5 24,6 25,6 78,6 79,6 37.994,6.516 29,7 78,7 79,7 49,8 50,8 56,8 57,8 63,8 64,8 49,9 50,9 56,9 57,9 63,9 64,9 29,9.796 31.545,9.796 33.262,9.796 4,10 5,10 4,11 5,11 76,11 29,11.608 31.545,11.608 33.262,11.608 51,12 52,12 66,12 67,12 75,12 76,12 44,13 51,13 52,13 4,14 5,14 28,14 29,14 4,15 5,15 28,15 29,15 56,15 57,15 79,15 56,16 57,16 18,17 19,17 37,17 38,17 79,17 5,17.25 6,17.25 18,18 19,18 37,18 38,18 79,18 5,18.25 6,18.25 60.537,18.963 30.7,19 44,19 45,19 44,20 45,20 57,20 58,20 60.537,20.491 75,21 76,21 79,21
NetC315_1: C315.1 CN301.S1 CN301.S2 CN301.S3 CN301.S4 R314.1 | length 22.2
  L1 (Sig) w0.5: R314.1 64.69,15.25 CN301.S4 ; C315.1 64.89,17
  L1 (Sig) w1: CN301.S4 64.89,17 CN301.S3 CN301.S2 CN301.S1
NetCN301_A5: CN301.A5 R311.2 | length 14.6
  L1 (Sig) w0.3: R311.2 v1(71.25,20.5) ; CN301.A5 v1(71.25,15.375)
  L4 (Sig) w0.3: v1(71.25,15.375) v1(71.25,20.5)
NetCN301_B5: CN301.B5 R310.2 | length 10.6
  L1 (Sig) w0.3: R310.2 62.772,18.747 62.772,18.003 v1(62.775,18) ; CN301.B5 68.25,15.1 v1(68.75,15.6)
  L2 (GND) w0.3: v1(62.775,18) 62.787,17.988 68.763,17.988 v1(68.775,17.975)
  L4 (Sig) w0.3: v1(68.75,15.6) 68.762,15.612 68.762,17.962 v1(68.775,17.975)
NetLED302_3: LED302.3 R317.1 | length 2.3
  L1 (Sig) w0.5: R317.1 77.825,18.875 78.15,18.55 LED302.3
NetR315_1: R315.1 R316.1 U301.4 | length 4.3
  L1 (Sig) w0.2: R316.1 75.905,1.345 U301.4 77.675,3.275 R315.1
NPOR: CN300.17 R304.2 | length 16.6
  L1 (Sig) w0.3: CN300.17 v1(9.5,5.75) ; v1(9.5,9) R304.2
  L4 (Sig) w0.3: v1(9.5,5.75) v1(9.5,9)
TARGET_UART_RX: CN300.2 R308.2 | length 18.4
  L1 (Sig) w0.3: v1(5.25,7.25) R308.2
  L4 (Sig) w0.3: CN300.2 5.074,2 5.25,2.176 v1(5.25,7.25)
TARGET_UART_TX: CN300.6 R309.2 | length 20.7
  L1 (Sig) w0.3: v1(4.5,8) v1(13.5,8) ; v1(13.5,5.5) R309.2
  L4 (Sig) w0.3: CN300.6 4.324,3 4.5,3.176 v1(4.5,8) ; v1(13.5,5.5) v1(13.5,8)
TCK: CN300.1 R300.2 | length 27.7
  L1 (Sig) w0.3: CN300.1 12,1.75 v1(12,1.7) ; v1(12,16) R300.2
  L4 (Sig) w0.3: v1(12,1.7) v1(12,16)
TDI: CN300.5 R301.2 | length 24.8
  L1 (Sig) w0.3: CN300.5 11.4,2.75 v1(11.4,2.8) ; v1(11.375,14.25) R301.2
  L4 (Sig) w0.3: v1(11.375,14.25) 11.388,14.237 11.388,2.812 v1(11.4,2.8)
TDO: CN300.9 R302.2 | length 22.1
  L1 (Sig) w0.3: CN300.9 v1(10.75,3.75) ; v1(10.75,12.5) R302.2
  L4 (Sig) w0.3: v1(10.75,3.75) v1(10.75,12.5)
TMS: CN300.13 R303.2 | length 19.3
  L1 (Sig) w0.3: CN300.13 10.009,4.75 10.059,4.8 v1(10.1,4.8) ; v1(10.125,10.75) R303.2
  L4 (Sig) w0.3: v1(10.1,4.8) 10.112,4.812 10.112,10.737 v1(10.125,10.75)
USB_FTDI_D_N: CN301.A7 CN301.B7 ESD301.2 U300.7 | length 39.1
  L1 (Sig) w0.2: U300.7 37.025,10.525 38.475,10.525 38.6,10.4 38.732,10.268 69.344,10.268 70.15,11.074 70.15,12.2 70.65,12.7 ESD301.2 70.725,13.5 ; CN301.A7 69.75,13.5 70.725,13.5 ; CN301.B7 70.725,14.4 70.725,13.5
USB_FTDI_D_P: CN301.A6 CN301.B6 ESD300.2 U300.8 | length 39.2
  L1 (Sig) w0.2: U300.8 37.025,10.975 38.661,10.975 38.918,10.718 69.158,10.718 69.7,11.26 69.7,12.275 69.275,12.7 ESD300.2@69.25,12.7 ; ESD300.2 ESD300.2@69.25,12.7 ; CN301.A6 70.25,15.3 69.3,15.3 69.3,14.4 CN301.B6 ESD300.2@69.25,12.7
VUSB_FILT: C312.2 D300.1 FB302.2 R305.2 | length 8.8
  L1 (Sig) w0.5: R305.2 56,11.5 D300.1@58.8,11.5 ; D300.1 D300.1@58.8,11.5 ; C312.2 C312.2@61.5,11.5 ; FB302.2 C312.2@61.5,11.5 ; D300.1@58.8,11.5 C312.2@61.5,11.5
pads on no net: CN300.3 CN300.4 CN300.7 CN300.8 CN300.11 CN300.12 CN300.14 CN300.15 CN300.16 CN300.18 CN300.19 CN300.20 CN300.21 CN300.22 CN300.23 CN300.24 CN300.25 CN300.26 CN300.27 CN300.28 CN300.29 CN300.30 CN300.31 CN300.32 CN300.33 CN300.34 CN300.35 CN300.36 CN300.37 CN300.38 CN300.39 CN300.40 CN300.41 CN300.42 CN300.43 CN300.44 CN300.45 CN300.46 CN300.47 CN300.48 CN300.49 CN300.50 CN300.51 CN300.52 CN300.53 CN300.54 CN300.55 CN300.56 CN300.57 CN300.58 CN300.MH CN301.0 CN301.A8 CN301.B8 LED300.1 LED300.2 LED301.1 LED301.2 LED302.1 LED302.2 U300.3 U300.21 U300.23 U300.24 U300.26 U300.27 U300.28 U300.29 U300.30 U300.32 U300.33 U300.34 U300.36 U300.40 U300.41 U300.43 U300.44 U300.45 U300.46 U300.48 U300.52 U300.53 U300.57 U300.58 U300.59 U300.60 U301.6 U301.7

## Polygon pours and split planes (outlines as drawn)
GND on L1 (Sig) "GND_L1" (solid, remove dead copper, pour order 6): 3.25,20.5 3,20.25 3,18.25 3.75,18.25 4,18 4,16.25 3.75,16 3.25,16 3,15.75 3,1.75 3.25,1.5 4.25,1.5 4.5,1.25 4.5,0.75 4.75,0.5 79.25,0.5 79.5,0.75 79.5,7.5 79.25,7.75 78,7.75 76.75,9 76.75,13 78,14.25 79.25,14.25 79.5,14.5 79.5,21.25 79.25,21.5 4.75,21.5 4.5,21.25 4.5,20.75 4.25,20.5
+3.3V on L1 (Sig) "+3.3V_L1" (solid, remove dead copper, pour order 0): 6.25,21.5 6.5,21.25 6.5,19.5 6.25,19.25 3,19.25 3,20.5 4.25,20.5 4.5,20.75 4.5,21.25 4.75,21.5
GND on L4 (Sig) "GND_L4" (solid, remove dead copper, pour order 7): 3.25,20.5 3,20.25 3,18.25 3.75,18.25 4,18 4,16.25 3.75,16 3.25,16 3,15.75 3,1.75 3.25,1.5 4.25,1.5 4.5,1.25 4.5,0.75 4.75,0.5 79.25,0.5 79.5,0.75 79.5,7.5 79.25,7.75 78,7.75 76.75,9 76.75,13 78,14.25 79.25,14.25 79.5,14.5 79.5,21.25 79.25,21.5 4.75,21.5 4.5,21.25 4.5,20.75 4.25,20.5
GND on L4 (Sig) "GND_L4" (solid, remove dead copper, pour order 1): 3.75,18.25 4,18 4,17 4.25,16.75 6.25,16.75 6.5,17 6.5,18.75 6.25,19 3,19 3,18.25
+3.3V on L3 (PWR) "+3.3V_L3" (solid, remove dead copper, pour order 2): 79.5,21.25 79.25,21.5 4.75,21.5 4.5,21.25 4.5,20.5 3,20.5 3,19.25 19.75,19.25 20,19 20,0.75 20.25,0.5 79.25,0.5 79.5,0.75 79.5,7.5 79.25,7.75 78,7.75 76.75,9 76.75,13 78,14.25 79.25,14.25 79.5,14.5
GND on L2 (GND) "GND_L2" (solid, remove dead copper, pour order 3): 3.25,20.5 3,20.25 3,18.25 3.75,18.25 4,18 4,16.25 3.75,16 3.25,16 3,15.75 3,1.75 3.25,1.5 4.25,1.5 4.5,1.25 4.5,0.75 4.75,0.5 79.25,0.5 79.5,0.75 79.5,7.5 79.25,7.75 78,7.75 76.75,9 76.75,13 78,14.25 79.25,14.25 79.5,14.5 79.5,21.25 79.25,21.5 4.75,21.5 4.5,21.25 4.5,20.75 4.25,20.5

## Silkscreen, mask and mechanical layers (free items; w line width, h text height)
Top Overlay:
  drawing of 14 lines, arcs and shapes, not listed
  text "TXD" at 52.987,19.25 h1.52
  text "RXD" at 53,17 h1.52
  text "TCK" at 16.75,15.375 h1
  text "TDI" at 16.75,13.625 h1
  text "TDO" at 16.75,11.875 h1
  text "TMS" at 16.75,10.125 h1
  text "NPOR" at 16.75,8.375 h1
  text "UART_TX" at 16.75,6.625 h1
  text "UART_RX" at 16.75,4.875 h1
  text "FTDI JTAG Program SOM B'd (Rev.A)" at 44,3.783 h1.5
  text "Designed by Ganghyeok Lim" at 55.5,2.189 h1

## Text inside footprints (layer, text, board x,y; h text height)
CN300: Mechanical 13 "M" at 3.75,17.583 h1 r270; Mechanical 13 "TOP" at 74.35,12.983 h1 r270